# EAGLE board cold-finger-board (EAGLE 9.3.0), part 1 of 2
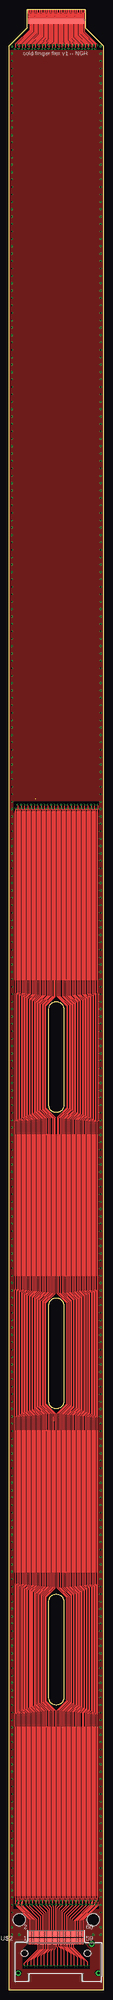
[diagram p0: board, top side]
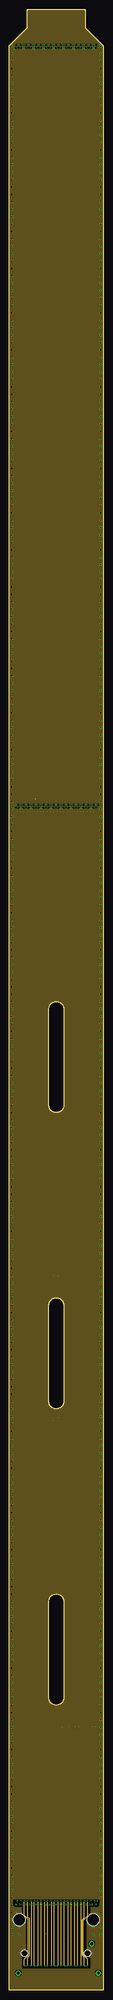
[diagram p1: board, inner layer Route2]
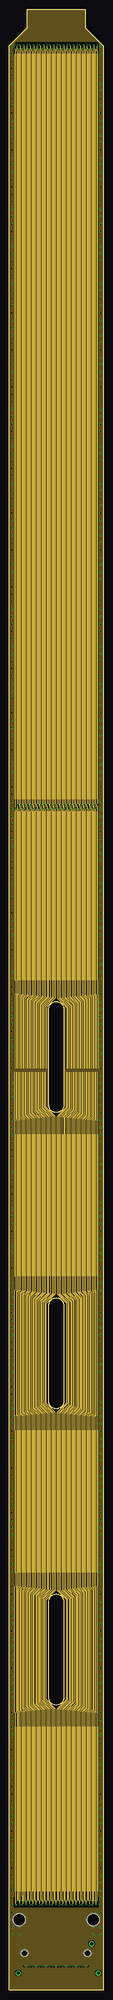
[diagram p2: board, inner layer Route15]
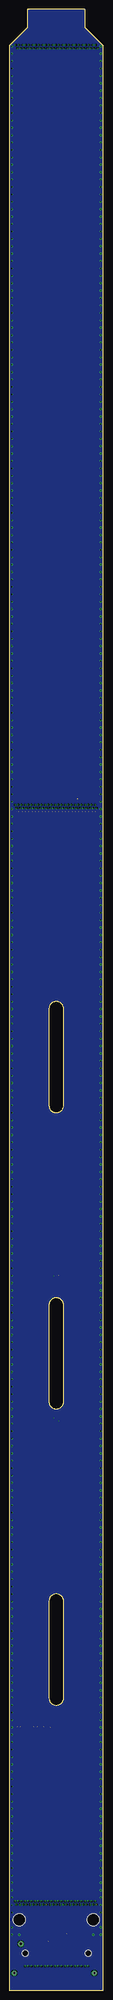
[diagram p3: board, bottom side, seen from below]

Size 25.4 x 535 mm. Coordinates in mm from the lower left corner, seen from the top.
Outline: 4.9,530 0,525.1 0,0 25.4,0 25.4,525.1 20.5,530 20.5,534.9 20.4,535 5,535 4.9,534.9 4.9,530
Outline: 10.7,265 arc-90 12.7,267 arc-90 14.7,265 14.7,239 arc-90 12.7,237 arc-90 10.7,239 10.7,265
Outline: 10.7,105 arc-90 12.7,107 arc-90 14.7,105 14.7,79 arc-90 12.7,77 arc-90 10.7,79 10.7,105
Outline: 10.7,185 arc-90 12.7,187 arc-90 14.7,185 14.7,159 arc-90 12.7,157 arc-90 10.7,159 10.7,185
Copper layers (1*2+15*16): Top 0.035mm / dielectric 0.2mm / Route2 0.035mm / dielectric 0.15mm / Route15 0.035mm / dielectric 0.2mm / Bottom 0.035mm
Design rules "default *": minimum track width 0.1mm, minimum drill 0.2mm, track to track 0.1mm, track to pad 0.1mm, pad to pad 0.1mm, via to via 0.1mm, smd to smd 0.1mm, copper to edge 0.1mm, drill to drill 5mil, minimum pad ring 3mil, minimum via ring 3mil, stop-mask expansion 0.1mm, vias tented up to drill 0.26mm, thermal gap 10mil
Net classes: 0 default: width 0.1 mm, drill 0.2 mm, clearance 0.1 mm
Holes 3.3 mm at 2.7,19 22.7,19
tRestrict: area 1.2,318 to 24.2,321; area 1.2,22 to 24.2,25; area 3.7,6 to 21.7,12.5

## Footprints (pad centres in the part's own frame; a part is rotated, then mirrored left to right if it is on the bottom)
MOLEX_502598-5193-JUMPER = smd 0.2 x 1.4: 1 -7.5,-3.2; 2 -7.2,-3.2; 3 -6.9,-3.2; 4 -6.6,-3.2; 5 -6.3,-3.2; 6 -6,-3.2; 7 -5.7,-3.2; 8 -5.4,-3.2; 9 -5.1,-3.2; 10 -4.8,-3.2; 11 -4.5,-3.2; 12 -4.2,-3.2; 13 -3.9,-3.2; 14 -3.6,-3.2; 15 -3.3,-3.2; 16 -3,-3.2; 17 -2.7,-3.2; 18 -2.4,-3.2; 19 -2.1,-3.2; 20 -1.8,-3.2; 21 -1.5,-3.2; 22 -1.2,-3.2; 23 -0.9,-3.2; 24 -0.6,-3.2; 25 -0.3,-3.2; 26 0,-3.2; 27 0.3,-3.2; 28 0.6,-3.2; 29 0.9,-3.2; 30 1.2,-3.2; 31 1.5,-3.2; 32 1.8,-3.2; 33 2.1,-3.2; 34 2.4,-3.2; 35 2.7,-3.2; 36 3,-3.2; 37 3.3,-3.2; 38 3.6,-3.2; 39 3.9,-3.2; 40 4.2,-3.2; 41 4.5,-3.2; 42 4.8,-3.2; 43 5.1,-3.2; 44 5.4,-3.2; 45 5.7,-3.2; 46 6,-3.2; 47 6.3,-3.2; 48 6.6,-3.2; 49 6.9,-3.2; 50 7.2,-3.2; 51 7.5,-3.2
MEC5-030-01-L-RA-W1-TR = smd 0.3 x 1.6: 1 -7.25,-1.01; 2 -7.25,1.01; 3 -6.75,-1.01; 4 -6.75,1.01; 5 -6.25,-1.01; 6 -6.25,1.01; 7 -5.75,-1.01; 8 -5.75,1.01; 9 -5.25,-1.01; 10 -5.25,1.01; 11 -4.75,-1.01; 12 -4.75,1.01; 13 -4.25,-1.01; 14 -4.25,1.01; 15 -3.75,-1.01; 16 -3.75,1.01; 17 -3.25,-1.01; 18 -3.25,1.01; 19 -2.75,-1.01; 20 -2.75,1.01; 21 -2.25,-1.01; 22 -2.25,1.01; 23 -1.75,-1.01; 24 -1.75,1.01; 25 -1.25,-1.01; 26 -1.25,1.01; 27 -0.75,-1.01; 28 -0.75,1.01; 29 -0.25,-1.01; 30 -0.25,1.01; 31 0.25,-1.01; 32 0.25,1.01; 33 0.75,-1.01; 34 0.75,1.01; 35 1.25,-1.01; 36 1.25,1.01; 37 1.75,-1.01; 38 1.75,1.01; 39 2.25,-1.01; 40 2.25,1.01; 41 2.75,-1.01; 42 2.75,1.01; 43 3.25,-1.01; 44 3.25,1.01; 45 3.75,-1.01; 46 3.75,1.01; 47 4.25,-1.01; 48 4.25,1.01; 49 4.75,-1.01; 50 4.75,1.01; 51 5.25,-1.01; 52 5.25,1.01; 53 5.75,-1.01; 54 5.75,1.01; 55 6.25,-1.01; 56 6.25,1.01; 57 6.75,-1.01; 58 6.75,1.01; 59 7.25,-1.01; 60 7.25,1.01 | drill 0.72 pad 1.32: G1 -10.18,-9.57; G2 11.45,-9.57 | drill 0.83 pad 1.44: G3 9.66,-1.67 | hole 1.75: 8.5,-4.22; -8.5,-4.22

## Placement (x,y rotation side)
U$1  502598-5193_JUMPER  [MOLEX_502598-5193-JUMPER]  12.7,534.94 0 top
U$2  MEC5-030-01-L-RA-W1-TRJ  [MEC5-030-01-L-RA-W1-TR]  12.6,14.2 0 top

## Library data of the parts
U$1 = molex_502598-5193-card
U$2 = MEC5-030-01-L-RA-W1-TR; AVAILABILITY: Unavailable; DESCRIPTION: Conn, Card Edge, Rcpt, 60POS, 0.5MM; MF: Samtec; MP: MEC5-030-01-L-RA-W1-TR; PACKAGE: None; PRICE: None

## Nets
1: U$1.51 U$2.60
2: U$1.50 U$2.58
3: U$1.49 U$2.56
4: U$1.48 U$2.54
5: U$1.47 U$2.52
6: U$1.46 U$2.50
7: U$1.45 U$2.49
8: U$1.44 U$2.48
9: U$1.43 U$2.47
10: U$1.42 U$2.46
11: U$1.41 U$2.45
12: U$1.40 U$2.44
13: U$1.39 U$2.43
14: U$1.38 U$2.42
15: U$1.37 U$2.41
16: U$1.36 U$2.40
17: U$1.35 U$2.39
18: U$1.34 U$2.38
19: U$1.33 U$2.37
20: U$1.32 U$2.36
21: U$1.31 U$2.35
22: U$1.30 U$2.34
23: U$1.29 U$2.33
24: U$1.28 U$2.32
25: U$1.27 U$2.31
26: U$1.26 U$2.30
27: U$1.25 U$2.29
28: U$1.24 U$2.28
29: U$1.23 U$2.27
30: U$1.22 U$2.26
31: U$1.21 U$2.25
32: U$1.20 U$2.24
33: U$1.19 U$2.23
34: U$1.18 U$2.22
35: U$1.17 U$2.21
36: U$1.16 U$2.20
37: U$1.15 U$2.19
38: U$1.14 U$2.18
39: U$1.13 U$2.17
40: U$1.12 U$2.16
41: U$1.11 U$2.15
42: U$1.10 U$2.14
43: U$1.9 U$2.13
44: U$1.8 U$2.12
45: U$1.7 U$2.11
46: U$1.6 U$2.10
47: U$1.5 U$2.8
48: U$1.4 U$2.6
49: U$1.3 U$2.4
50: U$1.2 U$2.2
GND: U$2.1 U$2.3 U$2.5 U$2.7 U$2.9 U$2.51 U$2.53 U$2.55 U$2.57 U$2.59 U$2.G1 U$2.G2 U$2.G3

## Tracks (layer width: path | path; a pad name or v marks a point on that pad's centre or on a via)
1  (via drill 0.25)
  Top 0.15: v23.88,24.05 23.88,22.88 19.85,18.85 U$2.60
  Top 0.2: U$1.51 20.2,528.89 23.45,525.64 23.45,525.55 v23.65,525.35 | v23.88,320.15 23.88,318.9 23.73,318.75 23.73,318.3 | v23.88,24.05 23.88,24.75 23.73,24.9 23.73,25.58
  Top 0.25: 23.73,272.85 23.73,269.4 23.9,269.23 23.9,234.77 23.73,234.6 23.73,231.15 | 23.73,192.85 23.73,189.3 23.9,189.13 23.9,154.87 23.73,154.7 23.73,151.15 | 23.73,112.85 23.73,109.8 23.9,109.63 23.9,74.67 23.73,74.5 23.73,71.15
  Top 0.35: 23.73,318.3 23.73,272.85 | 23.73,231.15 23.73,192.85 | 23.73,112.85 23.73,151.15 | 23.73,25.58 23.73,71.15
  Route15 0.2: v23.65,525.35 23.65,523.8 23.73,523.73 23.73,523.05 | 23.73,321.65 23.73,320.3 v23.88,320.15 23.88,318.45 23.73,318.3 | v23.88,24.05 23.73,24.2 23.73,26.7
  Route15 0.25: 23.73,272.85 23.73,269.08 23.9,268.91 23.9,249 | 23.73,231.15 23.7,231.18 23.7,234.89 23.88,235.07 23.88,248 | 23.73,192.85 23.73,189.09 23.9,188.91 23.9,155.09 23.7,154.89 23.7,151.18 23.73,151.15 | 23.73,112.85 23.73,109.09 23.9,108.91 23.9,75.09 23.7,74.89 23.7,71.17 23.73,71.15
  Route15 0.35: 23.73,523.05 23.73,321.65 | 23.73,318.3 23.73,272.85 | 23.73,192.85 23.73,231.15 | 23.73,112.85 23.73,151.15 | 23.73,26.7 23.73,71.15
2  (via drill 0.25)  (1 unrouted)
  Top 0.15: v23.42,23.15 23.42,22.88 19.35,18.8 U$2.58
  Top 0.2: v23.2,524.45 23.15,524.5 23.15,525.52 19.9,528.77 U$1.50 | v23.42,319.25 23.42,318.9 23.27,318.75 23.27,318.3 | v23.42,23.15 23.42,24.75 23.27,24.9 23.27,25.58
  Top 0.25: 23.27,273 23.27,269.36 23.55,269.08 23.55,234.92 23.27,234.64 23.27,231 | 23.27,193 23.27,189.26 23.55,188.98 23.55,155.02 23.27,154.74 23.27,151 | 23.27,113 23.27,109.76 23.55,109.48 23.55,74.82 23.27,74.54 23.27,71
  Top 0.35: 23.27,318.3 23.27,273 23.27,272.85 | 23.27,231.15 23.27,231 23.27,193 23.27,192.85 | 23.27,151.15 23.27,151 23.27,113 23.27,112.85 | 23.27,25.58 23.27,71 23.27,71.15
  Route15 0.2: v23.2,524.45 23.2,523.8 23.27,523.73 23.27,523.05 | 23.38,319.3 v23.42,319.25 | 23.27,321.65 23.27,320.42 23.38,320.32 23.38,319.3 | v23.42,23.15 23.38,23.2 23.38,24.22 23.27,24.32 23.27,26.7 | 23.27,318.3 23.35,318.38 23.35,318.45 23.38,318.48 23.38,319.3
  Route15 0.25: 23.27,273 23.27,269.04 23.55,268.76 23.55,249 | 23.27,231 23.27,234.96 23.53,235.21 23.53,248 | 23.27,193 23.27,189.04 23.55,188.76 23.55,155.24 23.27,154.96 23.27,151 | 23.27,113 23.27,109.04 23.55,108.76 23.55,75.23 23.27,74.96 23.27,71
  Route15 0.35: 23.27,523.05 23.27,321.65 | 23.27,272.85 23.27,273 23.27,318.3 | 23.27,231.15 23.27,231 23.27,193 23.27,192.85 | 23.27,151.15 23.27,151 23.27,113 23.27,112.85 | 23.27,71.15 23.27,71 23.27,26.7
3  (via drill 0.25)  (1 unrouted)
  Top 0.15: v22.98,24.05 22.98,22.88 18.85,18.76 U$2.56
  Top 0.2: U$1.49 19.6,528.59 22.55,525.64 22.55,525.55 v22.75,525.35 | v22.98,320.15 22.98,318.9 22.82,318.75 22.82,318.3 | v22.98,24.05 22.98,24.75 22.82,24.9 22.82,25.58
  Top 0.25: 22.82,273 22.82,269.31 23.2,268.94 23.2,235.06 22.82,234.69 22.82,231 | 22.82,193 22.82,189.21 23.2,188.84 23.2,155.16 22.82,154.79 22.82,151 | 22.82,113 22.82,109.71 23.2,109.34 23.2,74.96 22.82,74.59 22.82,71
  Top 0.35: 22.82,318.3 22.82,273 22.82,272.85 | 22.82,231.15 22.82,231 22.82,193 22.82,192.85 | 22.82,151.15 22.82,151 22.82,113 22.82,112.85 | 22.82,25.58 22.82,71 22.82,71.15
  Route15 0.2: v22.75,525.35 22.75,523.8 22.82,523.73 22.82,523.05 | 22.82,321.65 22.82,320.3 v22.98,320.15 22.98,318.53 22.9,318.45 22.9,318.38 22.82,318.3 | v22.98,24.05 22.82,24.2 22.82,26.7
  Route15 0.25: 22.82,273 22.82,269 23.2,268.62 23.2,249 | 22.82,231 22.82,235 23.18,235.36 23.18,248 | 22.82,193 22.82,189 23.2,188.62 23.2,155.38 22.82,155 22.82,151 | 22.82,113 22.82,109 23.2,108.62 23.2,75.38 22.82,75 22.82,71
  Route15 0.35: 22.82,523.05 22.82,321.65 | 22.82,272.85 22.82,273 22.82,318.3 | 22.82,231.15 22.82,231 22.82,193 22.82,192.85 | 22.82,151.15 22.82,151 22.82,113 22.82,112.85 | 22.82,71.15 22.82,71 22.82,26.7
4  (via drill 0.25)  (2 unrouted)
  Top 0.15: v22.52,23.15 22.52,22.89 18.35,18.71 U$2.54
  Top 0.2: v22.3,524.45 22.25,524.5 22.25,525.52 19.3,528.47 U$1.48 | v22.52,319.25 22.52,318.9 22.38,318.75 22.38,318.3 | v22.52,23.15 22.52,24.75 22.38,24.9 22.38,25.58
  Top 0.25: 22.38,273 22.38,269.27 22.85,268.79 22.85,235.21 22.38,234.73 22.38,231 | 22.38,193 22.38,189.17 22.85,188.69 22.85,155.31 22.38,154.83 22.38,151 | 22.38,113 22.38,109.67 22.85,109.19 22.85,75.11 22.38,74.63 22.38,71
  Top 0.35: 22.38,318.3 22.38,273 22.38,272.85 | 22.38,231.15 22.38,231 22.38,193 22.38,192.85 | 22.38,151.15 22.38,151 22.38,113 22.38,112.85 | 22.38,25.58 22.38,71 22.38,71.15
  Route15 0.2: v22.3,524.45 22.3,523.8 22.38,523.73 22.38,523.05 | 22.38,321.65 22.38,320.42 22.48,320.32 22.48,319.3 v22.52,319.25 22.52,318.53 22.45,318.45 22.45,318.38 22.38,318.3 | v22.52,23.15 22.48,23.2 22.48,24.22 22.38,24.32 22.38,26.7
  Route15 0.25: 22.38,273 22.38,268.95 22.85,268.48 22.85,249 | 22.38,231 22.38,235.05 22.83,235.5 22.83,248 | 22.38,193 22.38,188.95 22.85,188.47 22.85,155.53 22.38,155.05 22.38,151 | 22.38,113 22.38,108.95 22.85,108.47 22.85,75.53 22.38,75.05 22.38,71
  Route15 0.35: 22.38,523.05 22.38,321.65 | 22.38,272.85 22.38,273 22.38,318.3 | 22.38,231.15 22.38,231 22.38,193 22.38,192.85 | 22.38,151.15 22.38,151 22.38,113 22.38,112.85 | 22.38,71.15 22.38,71 22.38,26.7
5  (via drill 0.25)  (1 unrouted)
  Top 0.15: v22.07,24.05 22.07,22.89 17.85,18.66 U$2.52
  Top 0.2: U$1.47 19,528.29 21.65,525.64 21.65,525.55 v21.85,525.35 | v22.07,320.15 22.07,318.9 21.92,318.75 21.92,318.3 | v22.07,24.05 22.07,24.75 21.92,24.9 21.92,25.58
  Top 0.25: 21.92,273 21.92,269.22 22.5,268.65 22.5,235.35 21.92,234.78 21.92,231 | 21.92,193 21.92,189.12 22.5,188.55 22.5,155.45 21.92,154.88 21.92,151 | 21.92,113 21.92,109.62 22.5,109.05 22.5,75.25 21.92,74.68 21.92,71
  Top 0.35: 21.92,318.3 21.92,273 21.92,272.85 | 21.92,231.15 21.92,231 21.92,193 21.92,192.85 | 21.92,151.15 21.92,151 21.92,113 21.92,112.85 | 21.92,25.58 21.92,71 21.92,71.15
  Route15 0.2: v21.85,525.35 21.85,523.8 21.92,523.73 21.92,523.05 | 21.92,321.65 21.92,320.3 v22.07,320.15 22.07,318.53 22,318.45 22,318.38 21.92,318.3 | v22.07,24.05 21.92,24.2 21.92,26.7
  Route15 0.25: 21.92,273 21.92,268.9 22.5,268.33 22.5,249 | 21.92,231 21.92,235.1 22.48,235.65 22.48,248 | 21.92,193 21.92,188.91 22.5,188.33 22.5,155.67 21.92,155.09 21.92,151 | 21.92,113 21.92,108.91 22.5,108.33 22.5,75.67 21.92,75.09 21.92,71
  Route15 0.35: 21.92,523.05 21.92,321.65 | 21.92,272.85 21.92,273 21.92,318.3 | 21.92,231.15 21.92,231 21.92,193 21.92,192.85 | 21.92,151.15 21.92,151 21.92,113 21.92,112.85 | 21.92,71.15 21.92,71 21.92,26.7
6  (via drill 0.25)
  Top 0.15: v21.62,23.15 21.62,22.89 17.35,18.62 U$2.50
  Top 0.2: v21.4,524.45 21.35,524.5 21.35,525.52 18.7,528.17 U$1.46 | v21.62,319.25 21.62,318.9 21.48,318.75 21.48,318.3 | v21.62,23.15 21.62,24.75 21.48,24.9 21.48,25.58
  Top 0.25: 21.48,273 21.48,269.18 22.15,268.5 22.15,235.5 21.48,234.82 21.48,231 | 21.48,193 21.48,189.08 22.15,188.4 22.15,155.6 21.48,154.92 21.48,151 | 21.48,113 21.48,109.58 22.15,108.9 22.15,75.4 21.48,74.72 21.48,71
  Top 0.35: 21.48,318.3 21.48,273 21.48,272.85 | 21.48,231.15 21.48,231 21.48,193 21.48,192.85 | 21.48,151.15 21.48,151 21.48,113 21.48,112.85 | 21.48,25.58 21.48,71 21.48,71.15
  Route15 0.2: v21.4,524.45 21.4,523.8 21.48,523.73 21.48,523.05 | 21.48,321.65 21.48,320.42 21.58,320.32 21.58,319.3 v21.62,319.25 21.62,318.53 21.55,318.45 21.55,318.38 21.48,318.3 | v21.62,23.15 21.58,23.2 21.58,24.22 21.48,24.32 21.48,25.55 21.48,26.7
  Route15 0.25: 21.48,273 21.48,268.86 22.15,268.19 22.15,249 | 21.48,231 21.48,235.14 22.13,235.79 22.13,248 | 21.48,193 21.48,188.86 22.15,188.19 22.15,155.81 21.48,155.14 21.48,151 | 21.48,113 21.48,108.86 22.15,108.19 22.15,75.81 21.48,75.14 21.48,71
  Route15 0.35: 21.48,523.05 21.48,321.65 | 21.48,272.85 21.48,273 21.48,318.3 | 21.48,231.15 21.48,231 21.48,193 21.48,192.85 | 21.48,151.15 21.48,151 21.48,113 21.48,112.85 | 21.48,71.15 21.48,71 21.48,26.7
7  (via drill 0.25)  (1 unrouted)
  Top 0.15: v21.17,6.5 21.17,7.62 17.35,11.45 U$2.49
  Top 0.2: U$1.45 18.4,527.99 20.75,525.64 20.75,525.55 v20.95,525.35 | v21.17,320.15 21.17,318.9 21.02,318.75 21.02,318.3 | v21.17,24.05 21.17,24.75 21.02,24.9 21.02,25.58
  Top 0.25: 21.02,273 21.02,269.13 21.8,268.36 21.8,235.64 21.02,234.87 21.02,231 | 21.02,193 21.02,189.03 21.8,188.26 21.8,155.74 21.02,154.97 21.02,151 | 21.02,113 21.02,109.53 21.8,108.76 21.8,75.54 21.02,74.77 21.02,71
  Top 0.35: 21.02,318.3 21.02,273 21.02,272.85 | 21.02,231.15 21.02,231 21.02,193 21.02,192.85 | 21.02,151.15 21.02,151 21.02,113 21.02,112.85 | 21.02,25.58 21.02,71 21.02,71.15
  Route2 0.2: v21.17,6.5 21.17,8.38 20.02,9.53 20.02,18.94 21.17,20.09 v21.17,24.05
  Route15 0.2: v20.95,525.35 20.95,523.8 21.02,523.73 21.02,523.05 | 21.02,321.65 21.02,320.3 v21.17,320.15 21.17,318.53 21.1,318.45 21.1,318.38 21.02,318.3 | 21.02,26.7 21.02,24.2 v21.17,24.05
  Route15 0.25: 21.02,273 21.02,268.81 21.8,268.04 21.8,249 | 21.02,231 21.02,235.19 21.78,235.94 21.78,248 | 21.02,193 21.02,188.81 21.8,188.04 21.8,155.96 21.02,155.19 21.02,151 | 21.02,113 21.02,108.81 21.8,108.04 21.8,75.96 21.02,75.19 21.02,71
  Route15 0.35: 21.02,523.05 21.02,321.65 | 21.02,272.85 21.02,273 21.02,318.3 | 21.02,231.15 21.02,231 21.02,193 21.02,192.85 | 21.02,151.15 21.02,151 21.02,113 21.02,112.85 | 21.02,71.15 21.02,71 21.02,26.7
8  (via drill 0.25)
  Top 0.15: v20.73,23.15 20.73,22.95 16.85,19.07 U$2.48
  Top 0.2: v20.5,524.45 20.45,524.5 20.45,525.52 18.1,527.87 U$1.44 | v20.73,319.25 20.73,318.9 20.57,318.75 20.57,318.3 | v20.73,23.15 20.73,24.75 20.57,24.9 20.57,25.58
  Top 0.25: 20.57,273 20.57,269.09 21.45,268.21 21.45,235.79 20.62,234.96 20.62,231.05 20.57,231 | 20.57,193 20.57,188.99 21.45,188.11 21.45,155.89 20.62,155.06 20.62,151.05 20.57,151 | 20.57,113 20.57,109.49 21.45,108.61 21.45,75.69 20.62,74.86 20.62,71.05 20.57,71
  Top 0.35: 20.57,318.3 20.57,273 20.57,272.85 | 20.57,231.15 20.57,231 20.57,193 20.57,192.85 | 20.57,151.15 20.57,151 20.57,113 20.57,112.85 | 20.57,25.58 20.57,71 20.57,71.15
  Route15 0.2: v20.5,524.45 20.5,523.8 20.57,523.73 20.57,523.05 | 20.68,319.3 v20.73,319.25 | 20.57,321.65 20.57,320.42 20.68,320.32 20.68,319.3 | v20.73,23.15 20.68,23.2 20.68,24.22 20.57,24.32 20.57,26.7 | 20.57,318.3 20.65,318.38 20.65,318.45 20.68,318.48 20.68,319.3
  Route15 0.25: 20.57,273 20.57,268.77 21.45,267.89 21.45,249 | 20.57,231 20.57,235.23 21.43,236.08 21.43,248 | 20.57,193 20.57,188.77 21.45,187.9 21.45,156.1 20.57,155.23 20.57,151 | 20.57,113 20.57,108.77 21.45,107.9 21.45,76.11 20.57,75.23 20.57,71
  Route15 0.35: 20.57,523.05 20.57,321.65 | 20.57,272.85 20.57,273 20.57,318.3 | 20.57,231.15 20.57,231 20.57,193 20.57,192.85 | 20.57,151.15 20.57,151 20.57,113 20.57,112.85 | 20.57,71.15 20.57,71 20.57,26.7
9  (via drill 0.25)  (1 unrouted)
  Top 0.15: v20.27,6.5 20.27,8.07 16.85,11.5 U$2.47
  Top 0.2: U$1.43 17.8,527.69 19.85,525.64 19.85,525.55 v20.05,525.35 | v20.27,320.15 20.27,318.9 20.12,318.75 20.12,318.3 | v20.27,24.05 20.27,24.75 20.12,24.9 20.12,25.58
  Top 0.25: 20.12,273 20.12,269.04 21.1,268.07 21.1,235.93 20.12,234.96 20.12,231 | 20.12,193 20.12,188.94 21.1,187.97 21.1,156.03 20.12,155.06 20.12,151 | 20.12,113 20.12,109.44 21.1,108.47 21.1,75.83 20.12,74.86 20.12,71
  Top 0.35: 20.12,318.3 20.12,273 20.12,272.85 | 20.12,231.15 20.12,231 20.12,193 20.12,192.85 | 20.12,151.15 20.12,151 20.12,113 20.12,112.85 | 20.12,25.58 20.12,71 20.12,71.15
  Route2 0.2: v20.27,6.5 20.27,8.86 19.73,9.41 19.73,19.07 20.27,19.62 v20.27,24.05
  Route15 0.2: v20.05,525.35 20.05,523.8 20.12,523.73 20.12,523.05 | 20.12,321.65 20.12,320.3 v20.27,320.15 20.27,318.53 20.2,318.45 20.2,318.38 20.12,318.3 | 20.12,26.7 20.12,24.2 v20.27,24.05
  Route15 0.25: 20.12,273 20.12,268.73 21.1,267.75 21.1,249 | 20.12,231 20.12,235.27 21.08,236.23 21.08,248 | 20.12,193 20.12,188.72 21.1,187.75 21.1,156.25 20.12,155.28 20.12,151 | 20.12,113 20.12,108.72 21.1,107.75 21.1,76.25 20.12,75.28 20.12,71
  Route15 0.35: 20.12,523.05 20.12,321.65 | 20.12,272.85 20.12,273 20.12,318.3 | 20.12,231.15 20.12,231 20.12,193 20.12,192.85 | 20.12,151.15 20.12,151 20.12,113 20.12,112.85 | 20.12,71.15 20.12,71 20.12,26.7
10  (via drill 0.25)
  Top 0.15: v19.82,23.15 19.82,22.9 16.35,19.42 U$2.46
  Top 0.2: v19.6,524.45 19.55,524.5 19.55,525.52 17.5,527.57 U$1.42 | v19.82,319.25 19.82,318.9 19.67,318.75 19.67,318.3 | v19.82,23.15 19.82,24.75 19.67,24.9 19.67,25.58
  Top 0.25: 19.67,272.85 19.67,269 20.75,267.92 20.75,236.08 19.67,235 19.67,231.15 | 19.67,192.85 19.67,188.9 20.75,187.82 20.75,156.18 19.67,155.1 19.67,151.15 | 19.67,112.85 19.67,109.4 20.75,108.32 20.75,75.98 19.67,74.9 19.67,71.15
  Top 0.35: 19.67,318.3 19.67,272.85 | 19.67,192.85 19.67,231.15 | 19.67,151.15 19.67,112.85 | 19.67,71.15 19.67,25.58
  Route15 0.2: v19.6,524.45 19.6,523.8 19.67,523.73 19.67,523.05 | 19.78,319.3 v19.82,319.25 | 19.67,321.65 19.67,320.42 19.78,320.32 19.78,319.3 | v19.82,23.15 19.78,23.2 19.78,24.22 19.67,24.32 19.67,26.7 | 19.67,318.3 19.75,318.38 19.75,318.45 19.78,318.48 19.78,319.3
  Route15 0.25: 19.67,272.85 19.67,268.68 20.75,267.61 20.75,249 | 19.67,231.15 19.67,235.32 20.73,236.37 20.73,248 | 19.67,192.85 19.67,188.68 20.75,187.6 20.75,156.4 19.67,155.32 19.67,151.15 | 19.67,112.85 19.67,108.68 20.75,107.6 20.75,76.39 19.67,75.32 19.67,71.15
  Route15 0.35: 19.67,523.05 19.67,321.65 | 19.67,318.3 19.67,272.85 | 19.67,192.85 19.67,231.15 | 19.67,112.85 19.67,151.15 | 19.67,26.7 19.67,71.15
11  (via drill 0.25)  (1 unrouted)
  Top 0.15: v19.38,6.5 19.38,8.52 16.35,11.54 U$2.45
  Top 0.2: U$1.41 17.2,527.39 18.95,525.64 18.95,525.55 v19.15,525.35 | v19.38,320.15 19.38,318.9 19.23,318.75 19.23,318.3 | v19.38,24.05 19.38,24.75 19.23,24.9 19.23,25.58
  Top 0.25: 19.23,273 19.23,268.95 20.4,267.78 20.4,236.22 19.23,235.05 19.23,231 | 19.23,193 19.23,188.85 20.4,187.68 20.4,156.32 19.23,155.15 19.23,151 | 19.23,113 19.23,109.35 20.4,108.18 20.4,76.12 19.23,74.95 19.23,71
  Top 0.35: 19.23,318.3 19.23,273 19.23,272.85 | 19.23,231.15 19.23,231 19.23,193 19.23,192.85 | 19.23,151.15 19.23,151 19.23,113 19.23,112.85 | 19.23,25.58 19.23,71 19.23,71.15
  Route2 0.2: v19.38,6.5 v19.38,24.05
  Route15 0.2: v19.15,525.35 19.15,523.8 19.23,523.73 19.23,523.05 | 19.23,321.65 19.23,320.3 v19.38,320.15 19.38,318.53 19.3,318.45 19.3,318.38 19.23,318.3 | 19.23,26.7 19.23,24.2 v19.38,24.05
  Route15 0.25: 19.23,273 19.23,268.63 20.4,267.46 20.4,249 | 19.23,231 19.23,235.37 20.38,236.51 20.38,248 | 19.23,193 19.23,188.63 20.4,187.46 20.4,156.54 19.23,155.37 19.23,151 | 19.23,113 19.23,108.63 20.4,107.46 20.4,76.54 19.23,75.36 19.23,71
  Route15 0.35: 19.23,523.05 19.23,321.65 | 19.23,272.85 19.23,273 19.23,318.3 | 19.23,231.15 19.23,231 19.23,193 19.23,192.85 | 19.23,151.15 19.23,151 19.23,113 19.23,112.85 | 19.23,71.15 19.23,71 19.23,26.7
12  (via drill 0.25)  (1 unrouted)
  Top 0.15: v18.92,23.15 18.92,22.95 15.85,19.88 U$2.44
  Top 0.2: v18.7,524.45 18.65,524.5 18.65,525.52 16.9,527.27 U$1.40 | v18.92,319.25 18.92,318.9 18.77,318.75 18.77,318.3 | v18.92,23.15 18.92,24.75 18.77,24.9 18.77,25.58
  Top 0.25: 18.77,272.85 18.77,268.91 20.05,267.63 20.05,236.37 18.8,235.12 18.8,231.18 18.77,231.15 | 18.77,192.85 18.77,188.81 20.05,187.53 20.05,156.47 18.8,155.22 18.8,151.18 18.77,151.15 | 18.77,112.85 18.77,109.31 20.05,108.03 20.05,76.27 18.8,75.02 18.8,71.17 18.77,71.15
  Top 0.35: 18.77,318.3 18.77,272.85 | 18.77,192.85 18.77,231.15 | 18.77,151.15 18.77,112.85 | 18.77,25.58 18.77,71.15
  Route15 0.2: v18.7,524.45 18.7,523.8 18.77,523.73 18.77,523.05 | 18.77,321.65 18.77,320.42 18.88,320.32 18.88,319.3 v18.92,319.25 18.92,318.53 18.85,318.45 18.85,318.38 18.77,318.3 | v18.92,23.15 18.88,23.2 18.88,24.22 18.77,24.32 18.77,27.15
  Route15 0.25: 18.77,272.85 18.77,268.59 20.05,267.31 20.05,249 | 18.77,231.15 18.77,235.41 20.03,236.66 20.03,248 | 18.77,192.85 18.77,188.59 20.05,187.31 20.05,156.69 18.77,155.41 18.77,151.15 | 18.77,112.85 18.77,108.59 20.05,107.31 20.05,76.69 18.77,75.41 18.77,71.15
  Route15 0.35: 18.77,523.05 18.77,321.65 | 18.77,318.3 18.77,272.85 | 18.77,192.85 18.77,231.15 | 18.77,112.85 18.77,151.15 | 18.77,26.7 18.77,27.15 18.77,71.15
13  (via drill 0.25)  (1 unrouted)
  Top 0.15: v18.48,6.5 18.48,8.96 15.85,11.59 U$2.43
  Top 0.2: U$1.39 16.6,527.09 18.05,525.64 18.05,525.55 v18.25,525.35 | v18.48,320.15 18.48,318.9 18.32,318.75 18.32,318.3 | v18.48,24.05 18.48,24.75 18.32,24.9 18.32,25.58
  Top 0.25: 18.32,273 18.32,268.86 19.7,267.49 19.7,236.51 18.32,235.14 18.32,231 | 18.32,193 18.32,188.76 19.7,187.39 19.7,156.61 18.32,155.24 18.32,151 | 18.32,113 18.32,109.26 19.7,107.89 19.7,76.41 18.32,75.04 18.32,71
  Top 0.35: 18.32,318.3 18.32,273 18.32,272.85 | 18.32,231.15 18.32,231 18.32,193 18.32,192.85 | 18.32,151.15 18.32,151 18.32,113 18.32,112.85 | 18.32,25.58 18.32,71 18.32,71.15
  Route2 0.2: v18.48,6.5 v18.48,24.05
  Route15 0.2: v18.25,525.35 18.25,523.8 18.32,523.73 18.32,523.05 | 18.32,321.65 18.32,320.3 v18.48,320.15 18.48,318.53 18.4,318.45 18.4,318.38 18.32,318.3 | 18.32,26.7 18.32,24.2 v18.48,24.05
  Route15 0.25: 18.32,273 18.32,268.55 19.7,267.17 19.7,249 | 18.32,231 18.32,235.45 19.68,236.81 19.68,248 | 18.32,193 18.32,188.54 19.7,187.17 19.7,156.83 18.32,155.46 18.32,151 | 18.32,113 18.32,108.54 19.7,107.17 19.7,76.83 18.32,75.45 18.32,71
  Route15 0.35: 18.32,523.05 18.32,321.65 | 18.32,272.85 18.32,273 18.32,318.3 | 18.32,231.15 18.32,231 18.32,193 18.32,192.85 | 18.32,151.15 18.32,151 18.32,113 18.32,112.85 | 18.32,71.15 18.32,71 18.32,26.7
14  (via drill 0.25)  (1 unrouted)
  Top 0.15: v18.02,23.15 18.02,22.91 15.35,20.23 U$2.42
  Top 0.2: v17.8,524.45 17.75,524.5 17.75,525.52 16.3,526.97 U$1.38 | v18.02,319.25 18.02,318.9 17.88,318.75 17.88,318.3 | v18.02,23.15 18.02,24.75 17.88,24.9 17.88,25.58
  Top 0.25: 17.88,273 17.88,268.82 19.35,267.34 19.35,236.66 17.92,235.23 17.92,231.05 17.88,231 | 17.88,193 17.88,188.72 19.35,187.24 19.35,156.76 17.92,155.33 17.92,151.05 17.88,151 | 17.88,113 17.88,109.22 19.35,107.74 19.35,76.56 17.92,75.13 17.92,71.05 17.88,71
  Top 0.35: 17.88,318.3 17.88,273 17.88,272.85 | 17.88,231.15 17.88,231 17.88,193 17.88,192.85 | 17.88,151.15 17.88,151 17.88,113 17.88,112.85 | 17.88,25.58 17.88,71 17.88,71.15
  Route15 0.2: v17.8,524.45 17.8,523.8 17.88,523.73 17.88,523.05 | 17.98,319.3 v18.02,319.25 | 17.88,321.65 17.88,320.42 17.98,320.32 17.98,319.3 | v18.02,23.15 17.98,23.2 17.98,24.22 17.88,24.32 17.88,26.7 | 17.88,318.3 17.95,318.38 17.95,318.45 17.98,318.48 17.98,319.3
  Route15 0.25: 17.88,273 17.88,268.5 19.35,267.02 19.35,249 | 17.88,231 17.88,235.5 19.33,236.95 19.33,248 | 17.88,193 17.88,188.5 19.35,187.03 19.35,156.97 17.88,155.5 17.88,151 | 17.88,113 17.88,108.5 19.35,107.03 19.35,76.97 17.88,75.5 17.88,71
  Route15 0.35: 17.88,523.05 17.88,321.65 | 17.88,272.85 17.88,273 17.88,318.3 | 17.88,231.15 17.88,231 17.88,193 17.88,192.85 | 17.88,151.15 17.88,151 17.88,113 17.88,112.85 | 17.88,71.15 17.88,71 17.88,26.7
15  (via drill 0.25)  (1 unrouted)
  Top 0.15: v17.57,6.5 17.57,9.41 15.35,11.64 U$2.41
  Top 0.2: U$1.37 16,526.79 17.15,525.64 17.15,525.55 v17.35,525.35 | v17.57,320.15 17.57,318.9 17.42,318.75 17.42,318.3 | v17.57,24.05 17.57,24.75 17.42,24.9 17.42,25.58
  Top 0.25: 17.42,273 17.42,268.77 19,267.2 19,236.8 17.42,235.23 17.42,231 | 17.42,193 17.42,188.67 19,187.1 19,156.9 17.42,155.33 17.42,151 | 17.42,113 17.42,109.17 19,107.6 19,76.7 17.42,75.13 17.42,71
  Top 0.35: 17.42,318.3 17.42,273 17.42,272.85 | 17.42,231.15 17.42,231 17.42,193 17.42,192.85 | 17.42,151.15 17.42,151 17.42,113 17.42,112.85 | 17.42,25.58 17.42,71 17.42,71.15
  Route2 0.2: v17.57,24.05 v17.57,6.5
  Route15 0.2: v17.35,525.35 17.35,523.8 17.42,523.73 17.42,523.05 | 17.42,321.65 17.42,320.3 v17.57,320.15 17.57,318.53 17.5,318.45 17.5,318.38 17.42,318.3 | 17.42,26.7 17.42,24.2 v17.57,24.05
  Route15 0.25: 17.42,273 17.42,268.46 19,266.88 19,249 | 17.42,231 17.42,235.54 18.98,237.1 18.98,248 | 17.42,193 17.42,188.46 19,186.88 19,157.12 17.42,155.54 17.42,151 | 17.42,113 17.42,108.46 19,106.88 19,77.12 17.42,75.54 17.42,71
  Route15 0.35: 17.42,523.05 17.42,321.65 | 17.42,272.85 17.42,273 17.42,318.3 | 17.42,231.15 17.42,231 17.42,193 17.42,192.85 | 17.42,151.15 17.42,151 17.42,113 17.42,112.85 | 17.42,71.15 17.42,71 17.42,26.7
16  (via drill 0.25)
  Top 0.15: v17.12,23.15 17.12,22.96 14.85,20.69 U$2.40
  Top 0.2: v16.9,524.45 16.85,524.5 16.85,525.52 15.7,526.67 U$1.36 | v17.12,319.25 17.12,318.9 16.98,318.75 16.98,318.3 | v17.12,23.15 17.12,24.75 16.98,24.9 16.98,25.58
  Top 0.25: 16.98,273 16.98,268.73 18.65,267.05 18.65,236.95 17.02,235.32 17.02,231.05 16.98,231 | 16.98,193 16.98,188.63 18.65,186.95 18.65,157.05 17.02,155.42 17.02,151.05 16.98,151 | 16.98,113 16.98,109.13 18.65,107.45 18.65,76.85 17.02,75.22 17.02,71.05 16.98,71
  Top 0.35: 16.98,318.3 16.98,273 16.98,272.85 | 16.98,231.15 16.98,231 16.98,193 16.98,192.85 | 16.98,151.15 16.98,151 16.98,113 16.98,112.85 | 16.98,25.58 16.98,71 16.98,71.15
  Route15 0.2: v16.9,524.45 16.9,523.8 16.98,523.73 16.98,523.05 | 17.08,319.3 v17.12,319.25 | 16.98,321.65 16.98,320.42 17.08,320.32 17.08,319.3 | v17.12,23.15 17.08,23.2 17.08,24.22 16.98,24.32 16.98,26.7 | 16.98,318.3 17.05,318.38 17.05,318.45 17.08,318.48 17.08,319.3
  Route15 0.25: 16.98,273 16.98,268.41 18.65,266.74 18.65,249 | 16.98,231 16.98,235.59 18.63,237.24 18.63,248 | 16.98,193 16.98,188.41 18.65,186.74 18.65,157.26 16.98,155.59 16.98,151 | 16.98,113 16.98,108.41 18.65,106.74 18.65,77.26 16.98,75.59 16.98,71
  Route15 0.35: 16.98,523.05 16.98,321.65 | 16.98,272.85 16.98,273 16.98,318.3 | 16.98,231.15 16.98,231 16.98,193 16.98,192.85 | 16.98,151.15 16.98,151 16.98,113 16.98,112.85 | 16.98,71.15 16.98,71 16.98,26.7
17  (via drill 0.25)  (2 unrouted)
  Top 0.15: v16.68,6.5 16.68,9.86 14.85,11.68 U$2.39
  Top 0.2: U$1.35 15.4,526.49 16.25,525.64 16.25,525.55 v16.45,525.35 | v16.68,320.15 16.68,318.9 16.52,318.75 16.52,318.3 | v16.68,24.05 16.68,24.75 16.52,24.9 16.52,25.58
  Top 0.25: 16.52,273 16.52,268.68 18.3,266.91 18.3,237.09 16.52,235.32 16.52,231 | 16.52,193 16.52,188.58 18.3,186.81 18.3,157.19 16.52,155.42 16.52,151 | 16.52,113 16.52,109.08 18.3,107.31 18.3,76.99 16.52,75.22 16.52,71
  Top 0.35: 16.52,318.3 16.52,273 16.52,272.85 | 16.52,231.15 16.52,231 16.52,193 16.52,192.85 | 16.52,151.15 16.52,151 16.52,113 16.52,112.85 | 16.52,25.58 16.52,71 16.52,71.15
  Route2 0.2: v16.68,6.5 v16.68,24.05
  Route15 0.2: v16.45,525.35 16.45,523.8 16.52,523.73 16.52,523.05 | 16.52,321.65 16.52,320.3 v16.68,320.15 16.68,318.53 16.6,318.45 16.6,318.38 16.52,318.3 | 16.52,26.7 16.52,24.2 v16.68,24.05
  Route15 0.25: 16.52,273 16.52,268.37 18.3,266.59 18.3,249 | 16.52,231 16.52,235.63 18.28,237.38 18.28,248 | 16.52,193 16.52,188.37 18.3,186.59 18.3,157.41 16.52,155.63 16.52,151 | 16.52,113 16.52,108.37 18.3,106.59 18.3,77.41 16.52,75.63 16.52,71
  Route15 0.35: 16.52,523.05 16.52,321.65 | 16.52,272.85 16.52,273 16.52,318.3 | 16.52,231.15 16.52,231 16.52,193 16.52,192.85 | 16.52,151.15 16.52,151 16.52,113 16.52,112.85 | 16.52,71.15 16.52,71 16.52,26.7
18  (via drill 0.25)  (1 unrouted)
  Top 0.15: v16.22,23.15 16.22,22.91 14.35,21.04 U$2.38
  Top 0.2: v16,524.45 15.95,524.5 15.95,525.52 15.1,526.37 U$1.34 | v16.22,319.25 16.22,318.9 16.07,318.75 16.07,318.3 | v16.22,23.15 16.22,24.75 16.07,24.9 16.07,25.58
  Top 0.25: 16.07,273 16.07,268.64 17.95,266.76 17.95,237.24 16.12,235.41 16.12,231.05 16.07,231 | 16.07,193 16.07,188.54 17.95,186.66 17.95,157.34 16.12,155.51 16.12,151.05 16.07,151 | 16.07,113 16.07,109.04 17.95,107.16 17.95,77.14 16.12,75.31 16.12,71.05 16.07,71
  Top 0.35: 16.07,318.3 16.07,273 16.07,272.85 | 16.07,231.15 16.07,231 16.07,193 16.07,192.85 | 16.07,151.15 16.07,151 16.07,113 16.07,112.85 | 16.07,25.58 16.07,71 16.07,71.15
  Route15 0.2: v16,524.45 16,523.8 16.07,523.73 16.07,523.05 | 16.07,321.65 16.07,320.42 16.18,320.32 16.18,319.3 v16.22,319.25 16.22,318.53 16.15,318.45 16.15,318.38 16.07,318.3 | v16.22,23.15 16.18,23.2 16.18,24.22 16.07,24.32 16.07,26.7
  Route15 0.25: 16.07,273 16.07,268.32 17.95,266.45 17.95,249 | 16.07,231 16.07,235.68 17.93,237.53 17.93,248 | 16.07,193 16.07,188.32 17.95,186.45 17.95,157.55 16.07,155.68 16.07,151 | 16.07,113 16.07,108.32 17.95,106.45 17.95,77.55 16.07,75.68 16.07,71
  Route15 0.35: 16.07,523.05 16.07,321.65 | 16.07,272.85 16.07,273 16.07,318.3 | 16.07,231.15 16.07,231 16.07,193 16.07,192.85 | 16.07,151.15 16.07,151 16.07,113 16.07,112.85 | 16.07,71.15 16.07,71 16.07,26.7
19  (via drill 0.25)  (1 unrouted)
  Top 0.15: v15.77,6.5 15.77,10.33 14.35,11.75 U$2.37
  Top 0.2: U$1.33 14.8,526.19 15.35,525.64 15.35,525.55 v15.55,525.35 | v15.77,320.15 15.77,318.9 15.62,318.75 15.62,318.3 | v15.77,24.05 15.77,24.75 15.62,24.9 15.62,25.58
  Top 0.25: 15.62,272.85 15.62,268.59 17.6,266.62 17.6,237.38 15.62,235.41 15.62,231.15 | 15.62,192.85 15.62,188.49 17.6,186.52 17.6,157.48 15.62,155.51 15.62,151.15 | 15.62,112.85 15.62,108.99 17.6,107.02 17.6,77.28 15.62,75.31 15.62,71.15
  Top 0.35: 15.62,318.3 15.62,272.85 | 15.62,231.15 15.62,192.85 | 15.62,112.85 15.62,151.15 | 15.62,25.58 15.62,71.15
  Route2 0.2: v15.77,24.05 v15.77,6.5
  Route15 0.2: v15.55,525.35 15.55,523.8 15.62,523.73 15.62,523.05 | 15.62,321.65 15.62,320.3 v15.77,320.15 15.77,318.53 15.7,318.45 15.7,318.38 15.62,318.3 | 15.62,26.7 15.62,24.2 v15.77,24.05
  Route15 0.25: 15.62,272.85 15.62,268.28 17.6,266.3 17.6,249 | 15.62,231.15 15.62,235.72 17.58,237.68 17.58,248 | 15.62,192.85 15.62,188.28 17.6,186.3 17.6,157.7 15.62,155.72 15.62,151.15 | 15.62,112.85 15.62,108.28 17.6,106.3 17.6,77.7 15.62,75.72 15.62,71.15
  Route15 0.35: 15.62,523.05 15.62,321.65 | 15.62,318.3 15.62,272.85 | 15.62,192.85 15.62,231.15 | 15.62,112.85 15.62,151.15 | 15.62,71.15 15.62,26.7
20  (via drill 0.25)  (1 unrouted)
  Top 0.15: v15.32,23.15 15.32,22.87 13.85,21.39 U$2.36
  Top 0.2: v15.1,524.45 15.05,524.5 15.05,525.52 14.5,526.07 U$1.32 | v15.32,319.25 15.32,318.9 15.17,318.75 15.17,318.3 | v15.32,23.15 15.32,24.75 15.17,24.9 15.17,25.58
  Top 0.25: 15.17,273 15.22,272.95 15.22,268.5 17.25,266.47 17.25,237.53 15.17,235.45 15.17,231 | 15.17,193 15.22,192.95 15.22,188.4 17.25,186.37 17.25,157.63 15.17,155.55 15.17,151 | 15.17,113 15.22,112.95 15.22,108.9 17.25,106.87 17.25,77.43 15.17,75.35 15.17,71
  Top 0.35: 15.17,318.3 15.17,273 15.17,272.85 | 15.17,231.15 15.17,231 15.17,193 15.17,192.85 | 15.17,151.15 15.17,151 15.17,113 15.17,112.85 | 15.17,25.58 15.17,71 15.17,71.15
  Route15 0.2: v15.1,524.45 15.1,523.8 15.17,523.73 15.17,523.05 | 15.17,321.65 15.17,320.42 15.28,320.32 15.28,319.3 v15.32,319.25 15.32,318.53 15.25,318.45 15.25,318.38 15.17,318.3 | v15.32,23.15 15.28,23.2 15.28,24.22 15.17,24.32 15.17,25.55 15.17,26.92
  Route15 0.25: 15.17,273 15.17,268.23 17.25,266.16 17.25,249 | 15.17,231 15.17,235.77 17.23,237.82 17.23,248 | 15.17,193 15.17,188.23 17.25,186.16 17.25,157.84 15.17,155.77 15.17,151 | 15.17,113 15.17,108.23 17.25,106.16 17.25,77.84 15.17,75.77 15.17,71
  Route15 0.35: 15.17,523.05 15.17,321.65 | 15.17,272.85 15.17,273 15.17,318.3 | 15.17,231.15 15.17,231 15.17,193 15.17,192.85 | 15.17,151.15 15.17,151 15.17,113 15.17,112.85 | 15.17,71.15 15.17,71 15.17,26.92 15.17,26.7
21  (via drill 0.25)  (1 unrouted)
  Top 0.15: v14.88,6.5 14.88,10.77 13.85,11.8 U$2.35
  Top 0.2: U$1.31 14.2,525.89 14.45,525.64 14.45,525.55 v14.65,525.35 | v14.88,320.15 14.88,318.9 14.72,318.75 14.72,318.3 | v14.88,24.05 14.88,24.75 14.72,24.9 14.72,25.58
  Top 0.25: 14.72,272.85 14.72,268.5 16.9,266.33 16.9,237.67 14.72,235.5 14.72,231.15 | 14.72,192.85 14.72,188.4 16.9,186.23 16.9,157.77 14.72,155.6 14.72,151.15 | 14.72,112.85 14.72,108.9 16.9,106.73 16.9,77.57 14.72,75.4 14.72,71.15
  Top 0.35: 14.72,318.3 14.72,272.85 | 14.72,192.85 14.72,231.15 | 14.72,112.85 14.72,151.15 | 14.72,25.58 14.72,71.15
  Route2 0.2: v14.88,6.5 v14.88,24.05
  Route15 0.2: v14.65,525.35 14.65,523.8 14.72,523.73 14.72,523.05 | 14.72,321.65 14.72,320.3 v14.88,320.15 14.88,318.53 14.8,318.45 14.8,318.38 14.72,318.3 | 14.72,26.7 14.72,24.2 v14.88,24.05
  Route15 0.25: 14.72,272.85 14.72,268.19 16.9,266.01 16.9,249 | 14.72,231.15 14.72,235.81 16.88,237.96 16.88,248 | 14.72,192.85 14.72,188.19 16.9,186.01 16.9,157.99 14.72,155.81 14.72,151.15 | 14.72,112.85 14.72,108.19 16.9,106.01 16.9,77.99 14.72,75.81 14.72,71.15
  Route15 0.35: 14.72,523.05 14.72,321.65 | 14.72,318.3 14.72,272.85 | 14.72,192.85 14.72,231.15 | 14.72,112.85 14.72,151.15 | 14.72,71.15 14.72,26.7
22  (via drill 0.25)  (1 unrouted)
  Top 0.15: v14.42,23.15 14.42,22.92 13.35,21.85 U$2.34
  Top 0.2: U$1.30 13.9,525.77 14.15,525.52 14.15,524.5 v14.2,524.45 | v14.42,319.25 14.42,318.9 14.27,318.75 14.27,318.3 | v14.42,23.15 14.42,24.75 14.27,24.9 14.27,25.58
  Top 0.25: 14.27,273 14.27,268.46 16.55,266.18 16.55,237.82 14.27,235.54 14.27,231 | 14.27,193 14.27,188.36 16.55,186.08 16.55,157.92 14.27,155.64 14.27,151 | 14.27,113 14.27,108.86 16.55,106.58 16.55,77.72 14.27,75.44 14.27,71
  Top 0.35: 14.27,318.3 14.27,273 14.27,272.85 | 14.27,231.15 14.27,231 14.27,193 14.27,192.85 | 14.27,151.15 14.27,151 14.27,113 14.27,112.85 | 14.27,25.58 14.27,71 14.27,71.15
  Route15 0.2: v14.2,524.45 14.2,523.8 14.27,523.73 14.27,523.05 | 14.27,321.65 14.27,320.42 14.38,320.32 14.38,319.3 v14.42,319.25 14.42,318.53 14.35,318.45 14.35,318.38 14.27,318.3 | v14.42,23.15 14.38,23.2 14.38,24.22 14.27,24.32 14.27,26.7
  Route15 0.25: 14.27,273 14.27,268.14 16.55,265.87 16.55,249 | 14.27,231 14.27,235.86 16.53,238.11 16.53,248 | 14.27,193 14.27,188.14 16.55,185.87 16.55,158.13 14.27,155.86 14.27,151 | 14.27,113 14.27,108.14 16.55,105.87 16.55,78.13 14.27,75.86 14.27,71
  Route15 0.35: 14.27,523.05 14.27,321.65 | 14.27,272.85 14.27,273 14.27,318.3 | 14.27,231.15 14.27,231 14.27,193 14.27,192.85 | 14.27,151.15 14.27,151 14.27,113 14.27,112.85 | 14.27,26.7 14.27,71 14.27,71.15
23  (via drill 0.25)  (1 unrouted)
  Top 0.15: v13.97,6.5 13.97,11.22 13.35,11.84 U$2.33
  Top 0.2: U$1.29 13.6,525.5 v13.75,525.35 | v13.97,320.15 13.97,318.9 13.82,318.75 13.82,318.3 | v13.97,24.05 13.97,24.75 13.82,24.9 13.82,25.58
  Top 0.25: 13.82,193 13.82,188.31 16.2,185.94 16.2,158.06 13.82,155.69 13.82,151 | 13.82,113 13.82,108.81 16.2,106.44 16.2,77.86 13.82,75.49 13.82,71 | 13.82,273 13.82,268.41 16.2,266.04 16.2,237.96 13.82,235.59 13.82,231
  Top 0.35: 13.82,318.3 13.82,273 13.82,272.85 | 13.82,231.15 13.82,231 13.82,193 13.82,192.85 | 13.82,151.15 13.82,151 13.82,113 13.82,112.85 | 13.82,25.58 13.82,71 13.82,71.15
  Route2 0.2: v13.97,6.5 v13.97,24.05
  Route15 0.2: v13.75,525.35 13.75,523.8 13.82,523.73 13.82,523.05 | 13.82,321.65 13.82,320.3 v13.97,320.15 13.97,318.53 13.9,318.45 13.9,318.38 13.82,318.3 | 13.82,26.7 13.82,24.2 v13.97,24.05
  Route15 0.25: 13.82,273 13.82,268.1 16.2,265.72 16.2,249 | 13.82,231 13.82,235.9 16.18,238.25 16.18,248 | 13.82,193 13.82,188.1 16.2,185.72 16.2,158.28 13.82,155.9 13.82,151 | 13.82,113 13.82,108.1 16.2,105.72 16.2,78.28 13.82,75.9 13.82,71
  Route15 0.35: 13.82,523.05 13.82,321.65 | 13.82,272.85 13.82,273 13.82,318.3 | 13.82,231.15 13.82,231 13.82,193 13.82,192.85 | 13.82,151.15 13.82,151 13.82,113 13.82,112.85 | 13.82,71.15 13.82,71 13.82,26.7
24  (via drill 0.25)  (2 unrouted)
  Top 0.15: v13.52,23.15 13.52,22.88 12.85,22.2 U$2.32
  Top 0.2: U$1.28 v13.3,524.45 | v13.52,319.25 13.52,318.9 13.38,318.75 13.38,318.3 | v13.52,23.15 13.52,24.75 13.38,24.9 13.38,25.58
  Top 0.25: 13.38,273 13.38,268.37 15.85,265.89 15.85,238.11 13.38,235.63 13.38,231 | 13.38,193 13.38,188.27 15.85,185.79 15.85,158.21 14.9,157.26 | 13.38,154.78 13.38,154.6 | 13.38,154.6 13.38,151 | 13.38,151 | 14.9,157.26 | 13.38,154.6 13.38,155.73 14.9,157.26 | 13.38,113 13.38,108.77 15.85,106.29 15.85,78.01 13.38,75.53 13.38,71
  Top 0.35: 13.38,318.3 13.38,273 13.38,272.85 | 13.38,231.15 13.38,231 13.38,193 13.38,192.85 | 13.38,151.15 13.38,151 13.38,113 13.38,112.85 | 13.38,25.58 13.38,71 13.38,71.15
  Route15 0.2: v13.3,524.45 13.3,523.8 13.38,523.73 13.38,523.05 | 13.38,321.65 13.38,320.42 13.48,320.32 13.48,319.3 v13.52,319.25 13.52,318.53 13.45,318.45 13.45,318.38 13.38,318.3 | v13.52,23.15 13.48,23.2 13.48,24.22 13.38,24.32 13.38,25.55 13.38,26.7
  Route15 0.25: 13.38,273 13.38,268.05 15.85,265.58 15.85,249 | 13.38,231 13.38,235.95 15.83,238.4 15.83,248 | 13.38,193 13.38,188.05 15.85,185.58 15.85,158.42 13.38,155.95 13.38,151 | 13.38,113 13.38,108.05 15.85,105.58 15.85,78.42 13.38,75.95 13.38,71
  Route15 0.35: 13.38,523.05 13.38,321.65 | 13.38,272.85 13.38,273 13.38,318.3 | 13.38,231.15 13.38,231 13.38,193 13.38,192.85 | 13.38,151.15 13.38,151 13.38,113 13.38,112.85 | 13.38,71.15 13.38,71 13.38,26.7
25  (via drill 0.25)  (1 unrouted)
  Top 0.15: v13.07,6.5 13.07,11.52 12.85,11.75 U$2.31
  Top 0.2: U$1.27 13,525.5 v12.85,525.35 | v13.07,320.15 13.07,318.9 12.92,318.75 12.92,318.3 | v13.07,24.05 13.07,24.75 12.92,24.9 12.92,25.58
  Top 0.25: 12.92,193 12.92,188.18 15.5,185.6 15.5,158.35 12.92,155.78 12.92,151 | 12.92,113 12.92,108.72 15.5,106.15 15.5,78.15 12.92,75.58 12.92,71 | 12.92,273 12.92,268.32 15.5,265.75 15.5,238.25 12.92,235.68 12.92,231
  Top 0.35: 12.92,318.3 12.92,273 12.92,272.85 | 12.92,231.15 12.92,231 12.92,193 12.92,192.85 | 12.92,151.15 12.92,151 12.92,113 12.92,112.85 | 12.92,25.58 12.92,71 12.92,71.15
  Route2 0.2: v13.07,24.05 v13.07,6.5
  Route15 0.2: v12.85,525.35 12.85,523.8 12.92,523.73 12.92,523.05 | 12.92,321.65 12.92,320.3 v13.07,320.15 13.07,318.53 13,318.45 13,318.38 12.92,318.3 | 12.92,26.7 12.92,24.2 v13.07,24.05
  Route15 0.25: 12.92,273 12.92,268.01 15.5,265.43 15.5,249 | 12.92,231 12.92,235.99 15.48,238.55 15.48,248 | 12.92,193 12.92,188.01 15.5,185.43 15.5,158.57 12.92,155.99 12.92,151 | 12.92,113 12.92,108.01 15.5,105.43 15.5,78.57 12.92,75.99 12.92,71
  Route15 0.35: 12.92,523.05 12.92,321.65 | 12.92,272.85 12.92,273 12.92,318.3 | 12.92,231.15 12.92,231 12.92,193 12.92,192.85 | 12.92,151.15 12.92,151 12.92,113 12.92,112.85 | 12.92,71.15 12.92,71 12.92,26.7
26  (via drill 0.25)
  Top 0.15: v12.62,23.15 12.62,22.83 12.35,22.55 U$2.30
  Top 0.2: U$1.26 12.7,525.77 12.45,525.52 12.45,524.5 v12.4,524.45 | v12.62,319.25 12.62,318.9 12.47,318.75 12.47,318.3 | v12.62,23.15 12.62,24.75 12.47,24.9 12.47,25.58
  Top 0.25: 12.47,273 12.47,268.32 9.9,265.75 9.9,238.25 12.47,235.68 12.47,231 | 12.47,193 12.47,188.22 9.9,185.65 9.9,158.35 12.47,155.78 12.47,151 | 12.47,113 12.47,108.72 9.9,106.15 9.9,78.15 12.47,75.58 12.47,71
  Top 0.35: 12.47,318.3 12.47,273 12.47,272.85 | 12.47,231.15 12.47,231 12.47,193 12.47,192.85 | 12.47,151.15 12.47,151 12.47,113 12.47,112.85 | 12.47,25.58 12.47,71 12.47,71.15
  Route15 0.2: v12.4,524.45 12.4,523.8 12.47,523.73 12.47,523.05 | 12.58,319.3 v12.62,319.25 | 12.47,321.65 12.47,320.42 12.58,320.32 12.58,319.3 | v12.62,23.15 12.58,23.2 12.58,24.22 12.47,24.32 12.47,26.7 | 12.47,318.3 12.55,318.38 12.55,318.45 12.58,318.48 12.58,319.3
  Route15 0.25: 12.47,273 12.47,268.01 9.92,265.45 9.92,249 | 12.47,231 12.47,235.99 9.9,238.57 9.9,248 | 12.47,193 12.47,188.01 9.92,185.46 9.92,158.54 12.47,155.99 12.47,151 | 12.47,113 12.47,108.01 9.92,105.46 9.92,78.55 12.47,75.99 12.47,71
  Route15 0.35: 12.47,523.05 12.47,321.65 | 12.47,272.85 12.47,273 12.47,318.3 | 12.47,231.15 12.47,231 12.47,193 12.47,192.85 | 12.47,151.15 12.47,151 12.47,113 12.47,112.85 | 12.47,71.15 12.47,71 12.47,26.7
27  (via drill 0.25)  (3 unrouted)
  Top 0.15: v12.17,6.5 12.17,11.08 12.35,11.25 U$2.29
  Top 0.2: U$1.25 12.4,525.89 12.15,525.64 12.15,525.55 v11.95,525.35 | v12.17,320.15 12.17,318.9 12.02,318.75 12.02,318.3 | v12.17,24.05 12.17,24.75 12.02,24.9 12.02,25.58
  Top 0.25: 12.02,273 12.02,268.37 9.55,265.89 9.55,238.11 12.02,235.63 12.02,231 | 12.02,193 12.02,188.26 9.55,185.79 9.55,158.21 12.02,155.73 12.02,153.8 | 12.02,151 | 12.02,151 12.02,153.8 | 12.02,153.8 12.02,154.78 | 12.02,71 12.02,75.53 9.55,78.01 9.55,106.29 12.02,108.77 12.02,113
  Top 0.35: 12.02,318.3 12.02,273 12.02,272.85 | 12.02,231.15 12.02,231 12.02,193 12.02,192.85 | 12.02,151.15 12.02,151 12.02,113 12.02,112.85 | 12.02,71.15 12.02,71 12.02,25.58
  Route2 0.2: v12.17,6.5 v12.17,24.05
  Route15 0.2: v11.95,525.35 11.95,523.8 12.02,523.73 12.02,523.05 | 12.02,321.65 12.02,320.3 v12.17,320.15 12.17,318.53 12.1,318.45 12.1,318.38 12.02,318.3 | 12.02,26.7 12.02,24.2 v12.17,24.05
  Route15 0.25: 12.02,273 12.02,268.05 9.57,265.6 9.57,249 | 12.02,231 12.02,235.95 9.55,238.42 9.55,248 | 12.02,193 12.02,188.05 9.57,185.6 9.57,158.4 12.02,155.95 12.02,151 | 12.02,113 12.02,108.05 9.57,105.6 9.57,78.4 12.02,75.95 12.02,71
  Route15 0.35: 12.02,523.05 12.02,321.65 | 12.02,272.85 12.02,273 12.02,318.3 | 12.02,231.15 12.02,231 12.02,193 12.02,192.85 | 12.02,151.15 12.02,151 12.02,113 12.02,112.85 | 12.02,71.15 12.02,71 12.02,26.7
28  (via drill 0.25)
  Top 0.15: v11.72,23.15 11.72,22.67 11.85,22.55 U$2.28
  Top 0.2: v11.5,524.45 11.55,524.5 11.55,525.52 12.1,526.07 U$1.24 | v11.72,319.25 11.72,318.9 11.57,318.75 11.57,318.3 | v11.72,23.15 11.72,24.75 11.57,24.9 11.57,25.58
  Top 0.25: 11.57,151 11.57,155.69 9.2,158.06 9.2,185.94 11.57,188.31 11.57,193 | 11.57,71 11.57,75.49 9.2,77.86 9.2,106.44 11.57,108.81 11.57,113 | 11.57,273 11.57,268.41 9.2,266.04 9.2,237.96 11.57,235.59 11.57,231
  Top 0.35: 11.57,318.3 11.57,273 11.57,272.85 | 11.57,231.15 11.57,231 11.57,193 11.57,192.85 | 11.57,151.15 11.57,151 11.57,113 11.57,112.85 | 11.57,25.58 11.57,71 11.57,71.15
  Route15 0.2: v11.5,524.45 11.5,523.8 11.57,523.73 11.57,523.05 | 11.68,319.3 v11.72,319.25 | 11.57,321.65 11.57,320.42 11.68,320.32 11.68,319.3 | v11.72,23.15 11.68,23.2 11.68,24.22 11.57,24.32 11.57,26.7 | 11.57,318.3 11.65,318.38 11.65,318.45 11.68,318.48 11.68,319.3
  Route15 0.25: 11.57,273 11.57,268.1 9.22,265.75 9.22,249 | 11.57,231 11.57,235.9 9.2,238.28 9.2,248 | 11.57,193 11.57,188.1 9.22,185.75 9.22,158.25 11.57,155.9 11.57,151 | 11.57,113 11.57,108.1 9.22,105.75 9.22,78.25 11.57,75.9 11.57,71
  Route15 0.35: 11.57,523.05 11.57,321.65 | 11.57,272.85 11.57,273 11.57,318.3 | 11.57,231.15 11.57,231 11.57,193 11.57,192.85 | 11.57,151.15 11.57,151 11.57,113 11.57,112.85 | 11.57,71.15 11.57,71 11.57,26.7
29  (via drill 0.25)  (1 unrouted)
  Top 0.15: v11.27,6.5 11.27,10.72 11.85,11.3 U$2.27
  Top 0.2: U$1.23 11.8,526.19 11.25,525.64 11.25,525.55 v11.05,525.35 | v11.27,320.15 11.27,318.9 11.12,318.75 11.12,318.3 | v11.27,24.05 11.27,24.75 11.12,24.9 11.12,25.58
  Top 0.25: 11.12,273 11.12,268.46 8.85,266.18 8.85,237.82 11.12,235.54 11.12,231 | 11.12,193 11.12,188.36 8.85,186.08 8.85,157.92 11.12,155.64 11.12,151 | 11.12,113 11.12,108.86 8.85,106.58 8.85,77.72 11.12,75.44 11.12,71
  Top 0.35: 11.12,318.3 11.12,273 11.12,272.85 | 11.12,231.15 11.12,231 11.12,193 11.12,192.85 | 11.12,151.15 11.12,151 11.12,113 11.12,112.85 | 11.12,25.58 11.12,71 11.12,71.15
  Route2 0.2: v11.27,24.05 v11.27,6.5
  Route15 0.2: v11.05,525.35 11.05,523.8 11.12,523.73 11.12,523.05 | 11.12,321.65 11.12,320.3 v11.27,320.15 11.27,318.53 11.2,318.45 11.2,318.38 11.12,318.3 | 11.12,26.7 11.12,24.2 v11.27,24.05
  Route15 0.25: 11.12,273 11.12,268.14 8.87,265.89 8.87,249 | 11.12,231 11.12,235.86 8.85,238.13 8.85,248 | 11.12,193 11.12,188.14 8.87,185.89 8.87,158.11 11.12,155.86 11.12,151 | 11.12,113 11.12,108.14 8.87,105.89 8.87,78.11 11.12,75.86 11.12,71
  Route15 0.35: 11.12,523.05 11.12,321.65 | 11.12,272.85 11.12,273 11.12,318.3 | 11.12,231.15 11.12,231 11.12,193 11.12,192.85 | 11.12,151.15 11.12,151 11.12,113 11.12,112.85 | 11.12,71.15 11.12,71 11.12,26.7
30  (via drill 0.25)  (1 unrouted)
  Top 0.15: v10.82,23.15 10.82,22.9 11.35,22.37 U$2.26
  Top 0.2: v10.6,524.45 10.65,524.5 10.65,525.52 11.5,526.37 U$1.22 | v10.82,319.25 10.82,318.9 10.67,318.75 10.67,318.3 | v10.82,23.15 10.82,24.75 10.67,24.9 10.67,25.58
  Top 0.25: 10.67,272.85 10.67,268.5 8.5,266.33 8.5,237.67 10.67,235.5 10.67,231.15 | 10.67,192.85 10.67,188.4 8.5,186.23 8.5,157.77 10.67,155.6 10.67,151.15 | 10.67,112.85 10.67,108.9 8.5,106.73 8.5,77.57 10.67,75.4 10.67,71.15
  Top 0.35: 10.67,318.3 10.67,272.85 | 10.67,231.15 10.67,192.85 | 10.67,151.15 10.67,112.85 | 10.67,25.58 10.67,71.15
  Route15 0.2: v10.6,524.45 10.6,523.8 10.67,523.73 10.67,523.05 | 10.67,321.65 10.67,320.42 10.78,320.32 10.78,319.3 v10.82,319.25 10.82,318.53 10.75,318.45 10.75,318.38 10.67,318.3 | v10.82,23.15 10.78,23.2 10.78,24.22 10.67,24.32 10.67,26.7 | 10.67,26.7
  Route15 0.25: 10.67,272.85 10.67,268.19 8.52,266.04 8.52,249 | 10.67,231.15 10.67,235.81 8.5,237.99 8.5,248 | 10.67,192.85 10.67,188.19 8.52,186.03 8.52,157.97 10.67,155.81 10.67,151.15 | 10.67,112.85 10.67,108.19 8.52,106.03 8.52,77.97 10.67,75.81 10.67,71.15
  Route15 0.35: 10.67,523.05 10.67,321.65 | 10.67,318.3 10.67,272.85 | 10.67,192.85 10.67,231.15 | 10.67,112.85 10.67,151.15 | 10.67,26.7 10.67,71.15
31  (via drill 0.25)  (1 unrouted)
  Top 0.15: v10.38,6.5 10.38,10.27 11.35,11.25 U$2.25
  Top 0.2: U$1.21 11.2,526.49 10.35,525.64 10.35,525.55 v10.15,525.35 | v10.38,320.15 10.38,318.9 10.22,318.75 10.22,318.3 | v10.38,24.05 10.38,24.75 10.22,24.9 10.22,25.58
  Top 0.25: 10.22,273 10.22,268.55 8.15,266.47 8.15,237.53 10.17,235.5 10.17,231.05 10.22,231 | 10.22,193 10.22,188.45 8.15,186.37 8.15,157.63 10.17,155.6 10.17,151.05 10.22,151 | 10.22,113 10.22,108.95 8.15,106.87 8.15,77.43 10.17,75.4 10.17,71.05 10.22,71
  Top 0.35: 10.22,318.3 10.22,273 10.22,272.85 | 10.22,231.15 10.22,231 10.22,193 10.22,192.85 | 10.22,151.15 10.22,151 10.22,113 10.22,112.85 | 10.22,25.58 10.22,71 10.22,71.15
  Route2 0.2: v10.38,6.5 v10.38,24.05
  Route15 0.2: v10.15,525.35 10.15,523.8 10.22,523.73 10.22,523.05 | 10.22,321.65 10.22,320.3 v10.38,320.15 10.38,318.53 10.3,318.45 10.3,318.38 10.22,318.3 | 10.22,26.7 10.22,24.2 v10.38,24.05
  Route15 0.25: 10.22,273 10.22,268.23 8.17,266.18 8.17,249 | 10.22,231 10.22,235.77 8.15,237.84 8.15,248 | 10.22,193 10.22,188.23 8.17,186.18 8.17,157.82 10.22,155.77 10.22,151 | 10.22,113 10.22,108.23 8.17,106.18 8.17,77.82 10.22,75.77 10.22,71
  Route15 0.35: 10.22,523.05 10.22,321.65 | 10.22,272.85 10.22,273 10.22,318.3 | 10.22,231.15 10.22,231 10.22,193 10.22,192.85 | 10.22,151.15 10.22,151 10.22,113 10.22,112.85 | 10.22,71.15 10.22,71 10.22,26.7
32  (via drill 0.25)
  Top 0.15: v9.92,23.15 9.92,22.94 10.85,22.02 U$2.24
  Top 0.2: v9.7,524.45 9.75,524.5 9.75,525.52 10.9,526.67 U$1.20 | v9.92,319.25 9.92,318.9 9.77,318.75 9.77,318.3 | v9.92,23.15 9.92,24.75 9.77,24.9 9.77,25.58
  Top 0.25: 9.77,272.85 9.77,268.59 7.8,266.62 7.8,237.38 9.77,235.41 9.77,231.15 | 9.77,192.85 9.77,188.49 7.8,186.52 7.8,157.48 9.77,155.51 9.77,151.15 | 9.77,112.85 9.77,108.99 7.8,107.02 7.8,77.28 9.77,75.31 9.77,71.15
  Top 0.35: 9.77,318.3 9.77,272.85 | 9.77,231.15 9.77,192.85 | 9.77,151.15 9.77,112.85 | 9.77,25.58 9.77,71.15
  Route15 0.2: v9.7,524.45 9.7,523.8 9.77,523.73 9.77,523.05 | 9.88,319.3 v9.92,319.25 | 9.77,321.65 9.77,320.42 9.88,320.32 9.88,319.3 | v9.92,23.15 9.88,23.2 9.88,24.22 9.77,24.32 9.77,25.55 9.77,26.7 | 9.77,318.3 9.85,318.38 9.85,318.45 9.88,318.48 9.88,319.3 | 9.77,26.7
  Route15 0.25: 9.77,272.85 9.77,268.28 7.82,266.32 7.82,249 | 9.77,231.15 9.77,235.72 7.8,237.7 7.8,248 | 9.77,192.85 9.77,188.28 7.82,186.32 7.82,157.68 9.77,155.72 9.77,151.15 | 9.77,112.85 9.77,108.28 7.82,106.32 7.82,77.67 9.77,75.72 9.77,71.15
  Route15 0.35: 9.77,523.05 9.77,321.65 | 9.77,318.3 9.77,272.85 | 9.77,192.85 9.77,231.15 | 9.77,112.85 9.77,151.15 | 9.77,26.7 9.77,71.15
33  (via drill 0.25)  (1 unrouted)
  Top 0.15: v9.47,6.5 9.47,9.85 10.85,11.23 U$2.23
  Top 0.2: U$1.19 10.6,526.79 9.45,525.64 9.45,525.55 v9.25,525.35 | v9.47,320.15 9.47,318.9 9.32,318.75 9.32,318.3 | v9.47,24.05 9.47,24.75 9.32,24.9 9.32,25.58
  Top 0.25: 9.32,273 9.27,272.95 9.27,268.59 7.45,266.76 7.45,237.24 9.32,235.36 9.32,231 | 9.32,193 9.27,192.95 9.27,188.49 7.45,186.66 7.45,157.34 9.32,155.46 9.32,151 | 9.32,113 9.27,112.95 9.27,108.99 7.45,107.16 7.45,77.14 9.32,75.26 9.32,71
  Top 0.35: 9.32,318.3 9.32,273 9.32,272.85 | 9.32,231.15 9.32,231 9.32,193 9.32,192.85 | 9.32,151.15 9.32,151 9.32,113 9.32,112.85 | 9.32,25.58 9.32,71 9.32,71.15
  Route2 0.2: v9.47,24.05 v9.47,6.5
  Route15 0.2: v9.25,525.35 9.25,523.8 9.32,523.73 9.32,523.05 | 9.32,321.65 9.32,320.3 v9.47,320.15 9.47,318.53 9.4,318.45 9.4,318.38 9.32,318.3 | 9.32,26.7 9.32,24.2 v9.47,24.05
  Route15 0.25: 9.32,273 9.32,268.32 7.47,266.47 7.47,249 | 9.32,231 9.32,235.68 7.45,237.55 7.45,248 | 9.32,193 9.32,188.32 7.47,186.47 7.47,157.53 9.32,155.68 9.32,151 | 9.32,113 9.32,108.32 7.47,106.47 7.47,77.53 9.32,75.68 9.32,71
  Route15 0.35: 9.32,523.05 9.32,321.65 | 9.32,272.85 9.32,273 9.32,318.3 | 9.32,231.15 9.32,231 9.32,193 9.32,192.85 | 9.32,151.15 9.32,151 9.32,113 9.32,112.85 | 9.32,71.15 9.32,71 9.32,26.7
34  (via drill 0.25)
  Top 0.15: v9.02,23.15 9.02,22.89 10.35,21.57 U$2.22
  Top 0.2: v8.8,524.45 8.85,524.5 8.85,525.52 10.3,526.97 U$1.18 | v9.02,319.25 9.02,318.9 8.88,318.75 8.88,318.3 | v9.02,23.15 9.02,24.75 8.88,24.9 8.88,25.58